# EAGLE board ComsoftFixV4_MSOP_EDITION (EAGLE 7.1.0)
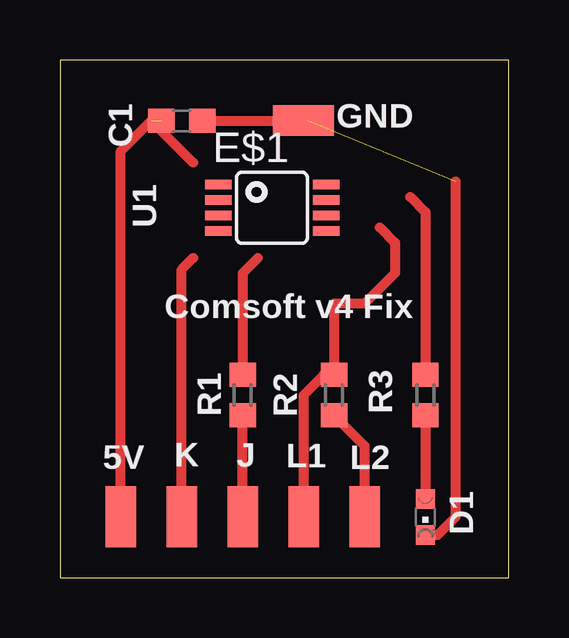
[diagram p0: board, top side]

Size 18.72 x 21.58 mm. Coordinates in mm from the lower left corner, seen from the top.
Outline: 0,0 18.72,0 18.72,21.58 0,21.58 0,0
Copper layers (1*16): Top 0.035mm / dielectric 1.5mm / Bottom 0.035mm
Design rules "default": minimum track width 10mil, minimum drill 24mil, track to track 8mil, track to pad 8mil, pad to pad 8mil, via to via 8mil, smd to smd 8mil, copper to edge 40mil, drill to drill 8mil, minimum pad ring 10mil, minimum via ring 8mil, stop-mask expansion 4mil, vias tented up to drill 0mil, thermal gap 10mil

## Footprints (pad centres in the part's own frame; a part is rotated, then mirrored left to right if it is on the bottom)
SMD1,27-2,54 = smd 1.27 x 2.54: 1 0,0
CHIPLED_0603 = smd 0.8 x 0.8: A 0,-0.75; C 0,0.75
C0603 = smd 1.1 x 1: 1 -0.85,0; 2 0.85,0
MSOP8 = smd 0.4 x 1.1: 1 -0.975,-2.25; 2 -0.325,-2.25; 3 0.325,-2.25; 4 0.975,-2.25; 5 0.975,2.25; 6 0.325,2.25; 7 -0.325,2.25; 8 -0.975,2.25
R0603 = smd 1 x 1.1: 1 -0.85,0; 2 0.85,0

## Placement (x,y rotation side)
5V  5V  [SMD1,27-2,54]  2.54,2.54 0 top
BLUED1  24mA  [CHIPLED_0603]  15.24,2.54 180 top
C1  0.1uF  [C0603]  5.08,19.05 180 top
E$1  [MSOP8]  8.85,15.43 270 top
GND  GND  [SMD1,27-2,54]  10.16,19.05 90 top
J  J  [SMD1,27-2,54]  7.62,2.54 0 top
K  K  [SMD1,27-2,54]  5.08,2.54 0 top
L1  L1  [SMD1,27-2,54]  10.16,2.54 0 top
L2  L2  [SMD1,27-2,54]  12.7,2.54 0 top
R1  1.5K  [R0603]  7.62,7.62 270 top
R2  10K  [R0603]  11.43,7.62 90 top
R3  100  [R0603]  15.24,7.62 90 top

## Library data of the parts
5V GND J K L1 L2 = wirepad
BLUED1 = led
C1 R1-R3 = rcl
E$1 = atmel

## Nets
GND: BLUED1.C C1.1 GND.1
K: J.1 R1.2
N$1: BLUED1.A R3.1
N$2: L1.1 R2.2
N$3: 5V.1 C1.2
N$4: L2.1 R2.1
N$5: R1.1
N$7: K.1
N$9: R3.2

## Tracks (layer width: path | path; a pad name or v marks a point on that pad's centre or on a via)
GND  (1 unrouted)
  Top 0.406: C1.1 GND.1 10.31,19.05 | BLUED1.C 15.76,1.79 16.51,2.54 16.51,16.51
K
  Top 0.406: J.1 R1.2
N$1
  Top 0.406: R3.1 BLUED1.A
N$2
  Top 0.406: 13.33,14.6 13.97,13.97 13.97,12.7 12.7,11.43 11.43,11.43 R2.2 11.01,8.47 10.16,7.62 L1.1
N$3  (1 unrouted)
  Top 0.406: 5V.1 2.54,17.78 3.81,19.05 5.56,17.3
N$4
  Top 0.406: R2.1 12.7,5.5 L2.1
N$5
  Top 0.406: 8.26,13.34 7.62,12.7 R1.1
N$7
  Top 0.406: K.1 5.08,12.85 5.56,13.34
N$9
  Top 0.406: 14.61,15.87 15.24,15.24 R3.2

## Text on the board
tPlace: C1 | GND | U1 | Comsoft v4 Fix | 5V | K | J | L1 | L2 | D1